# EAGLE board ArduinoDevBoardRevA (EAGLE 9.0.0)
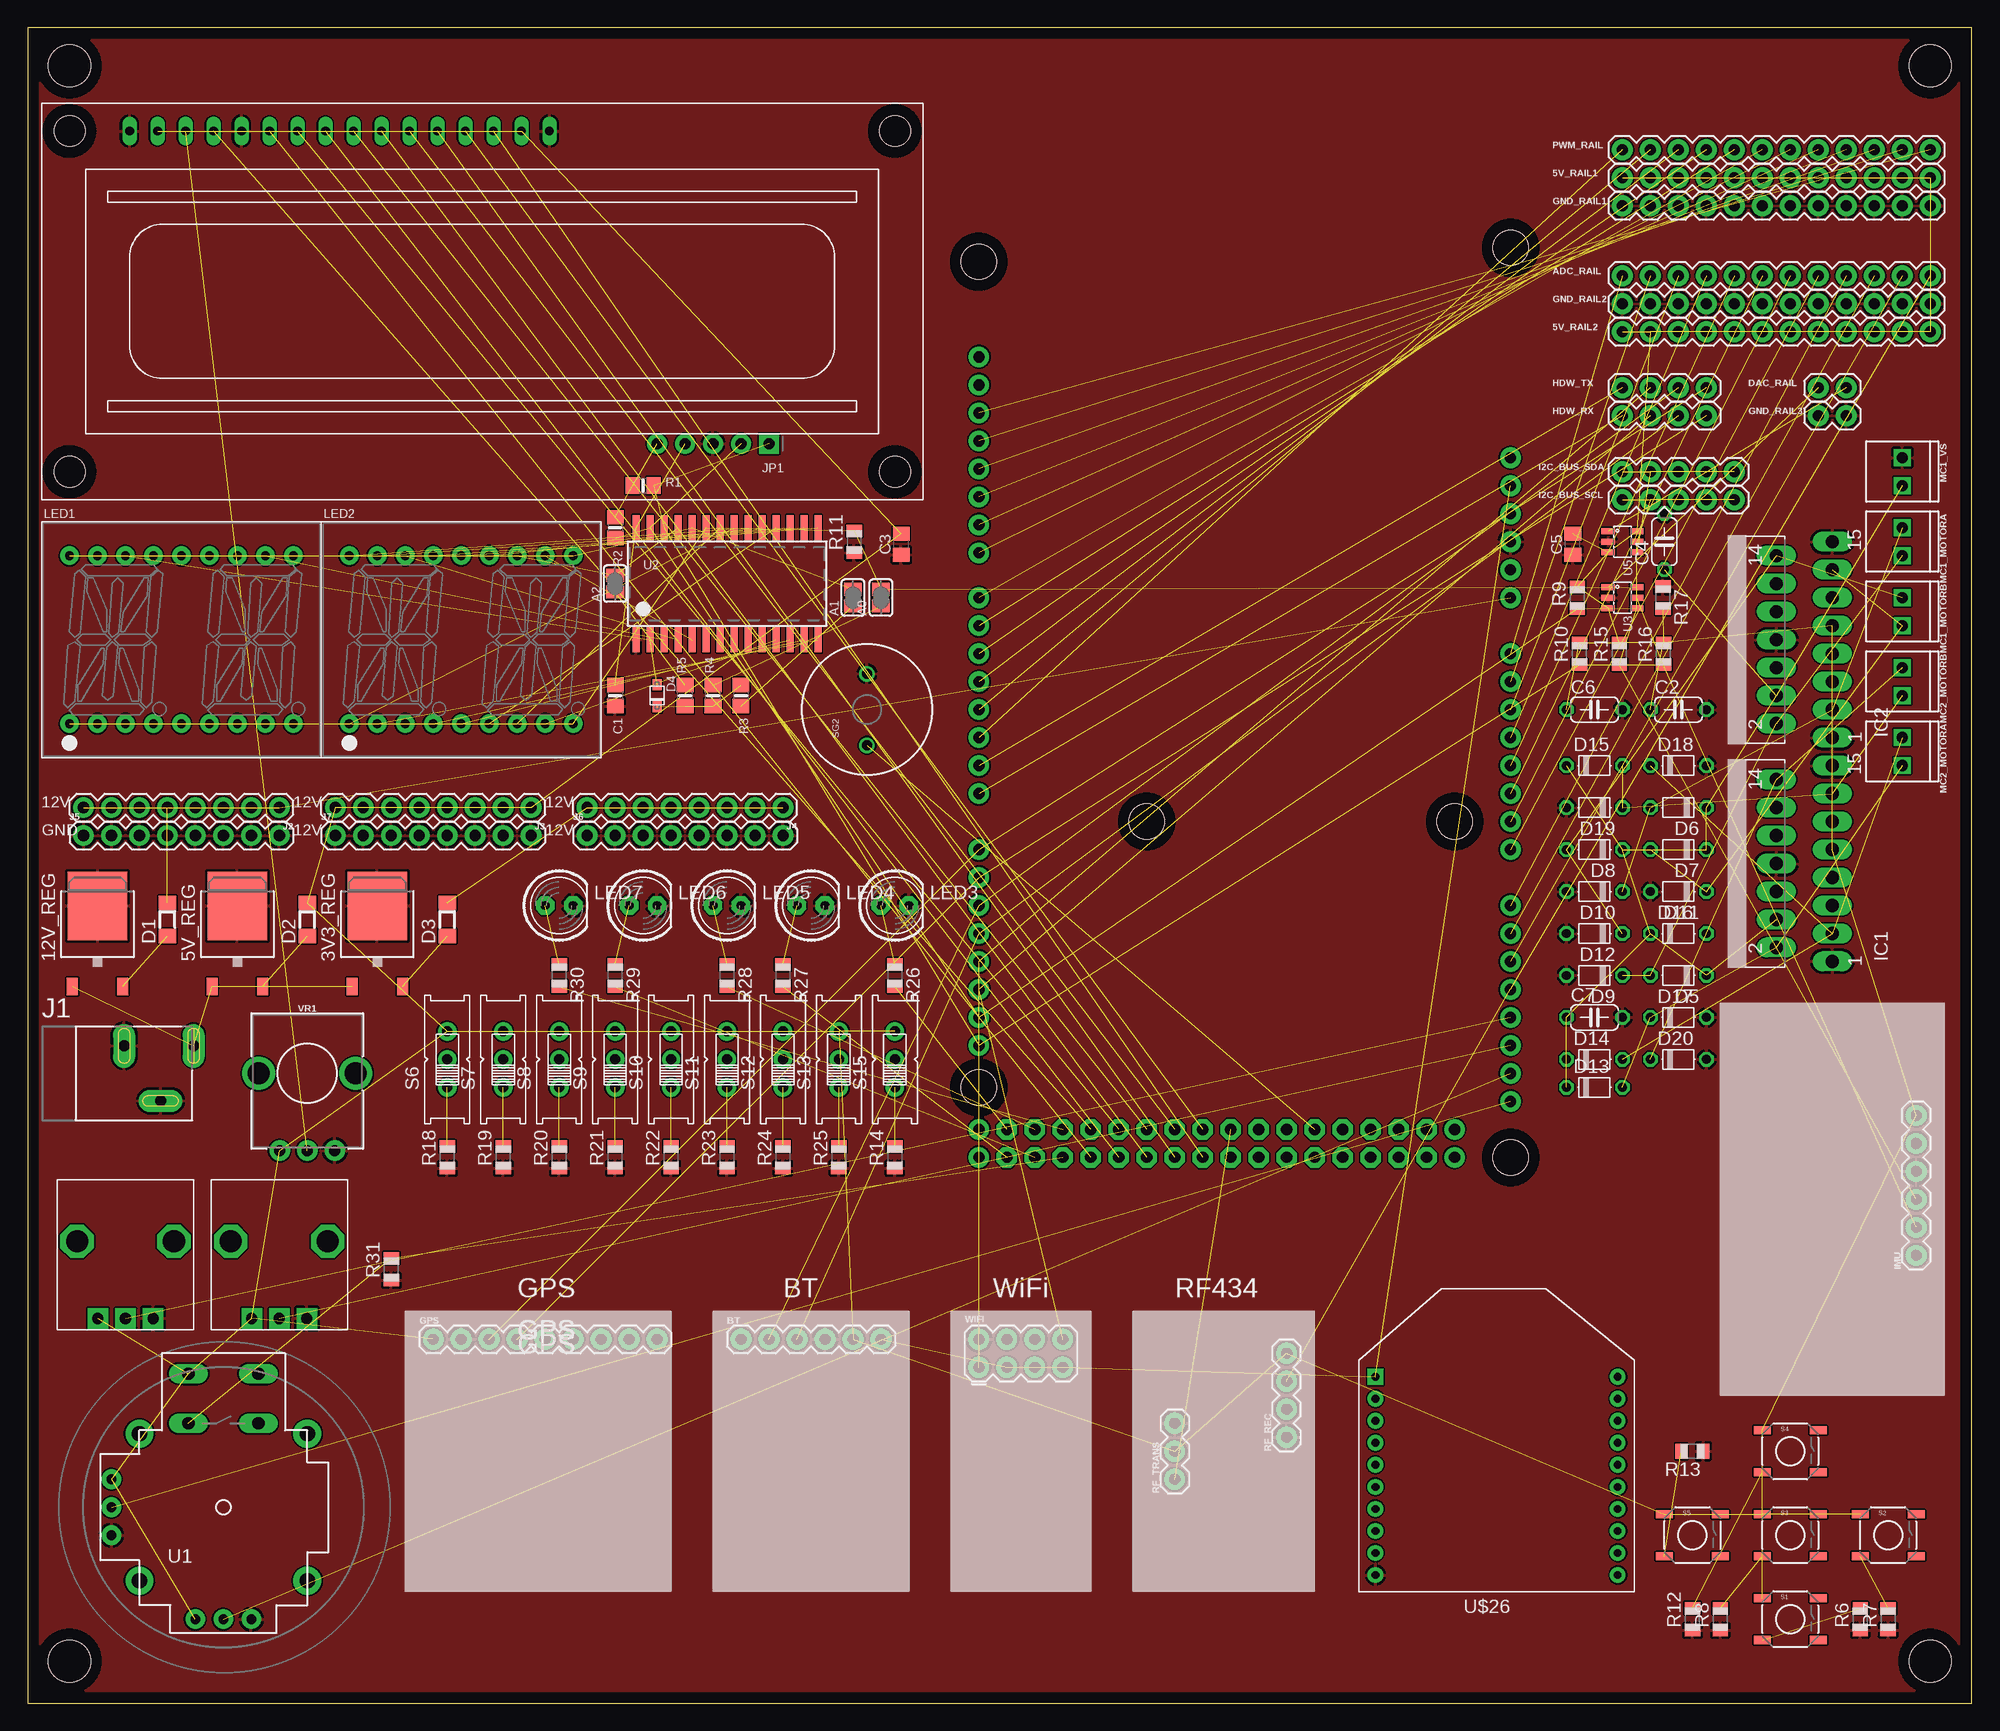
[diagram p0: board, top side]
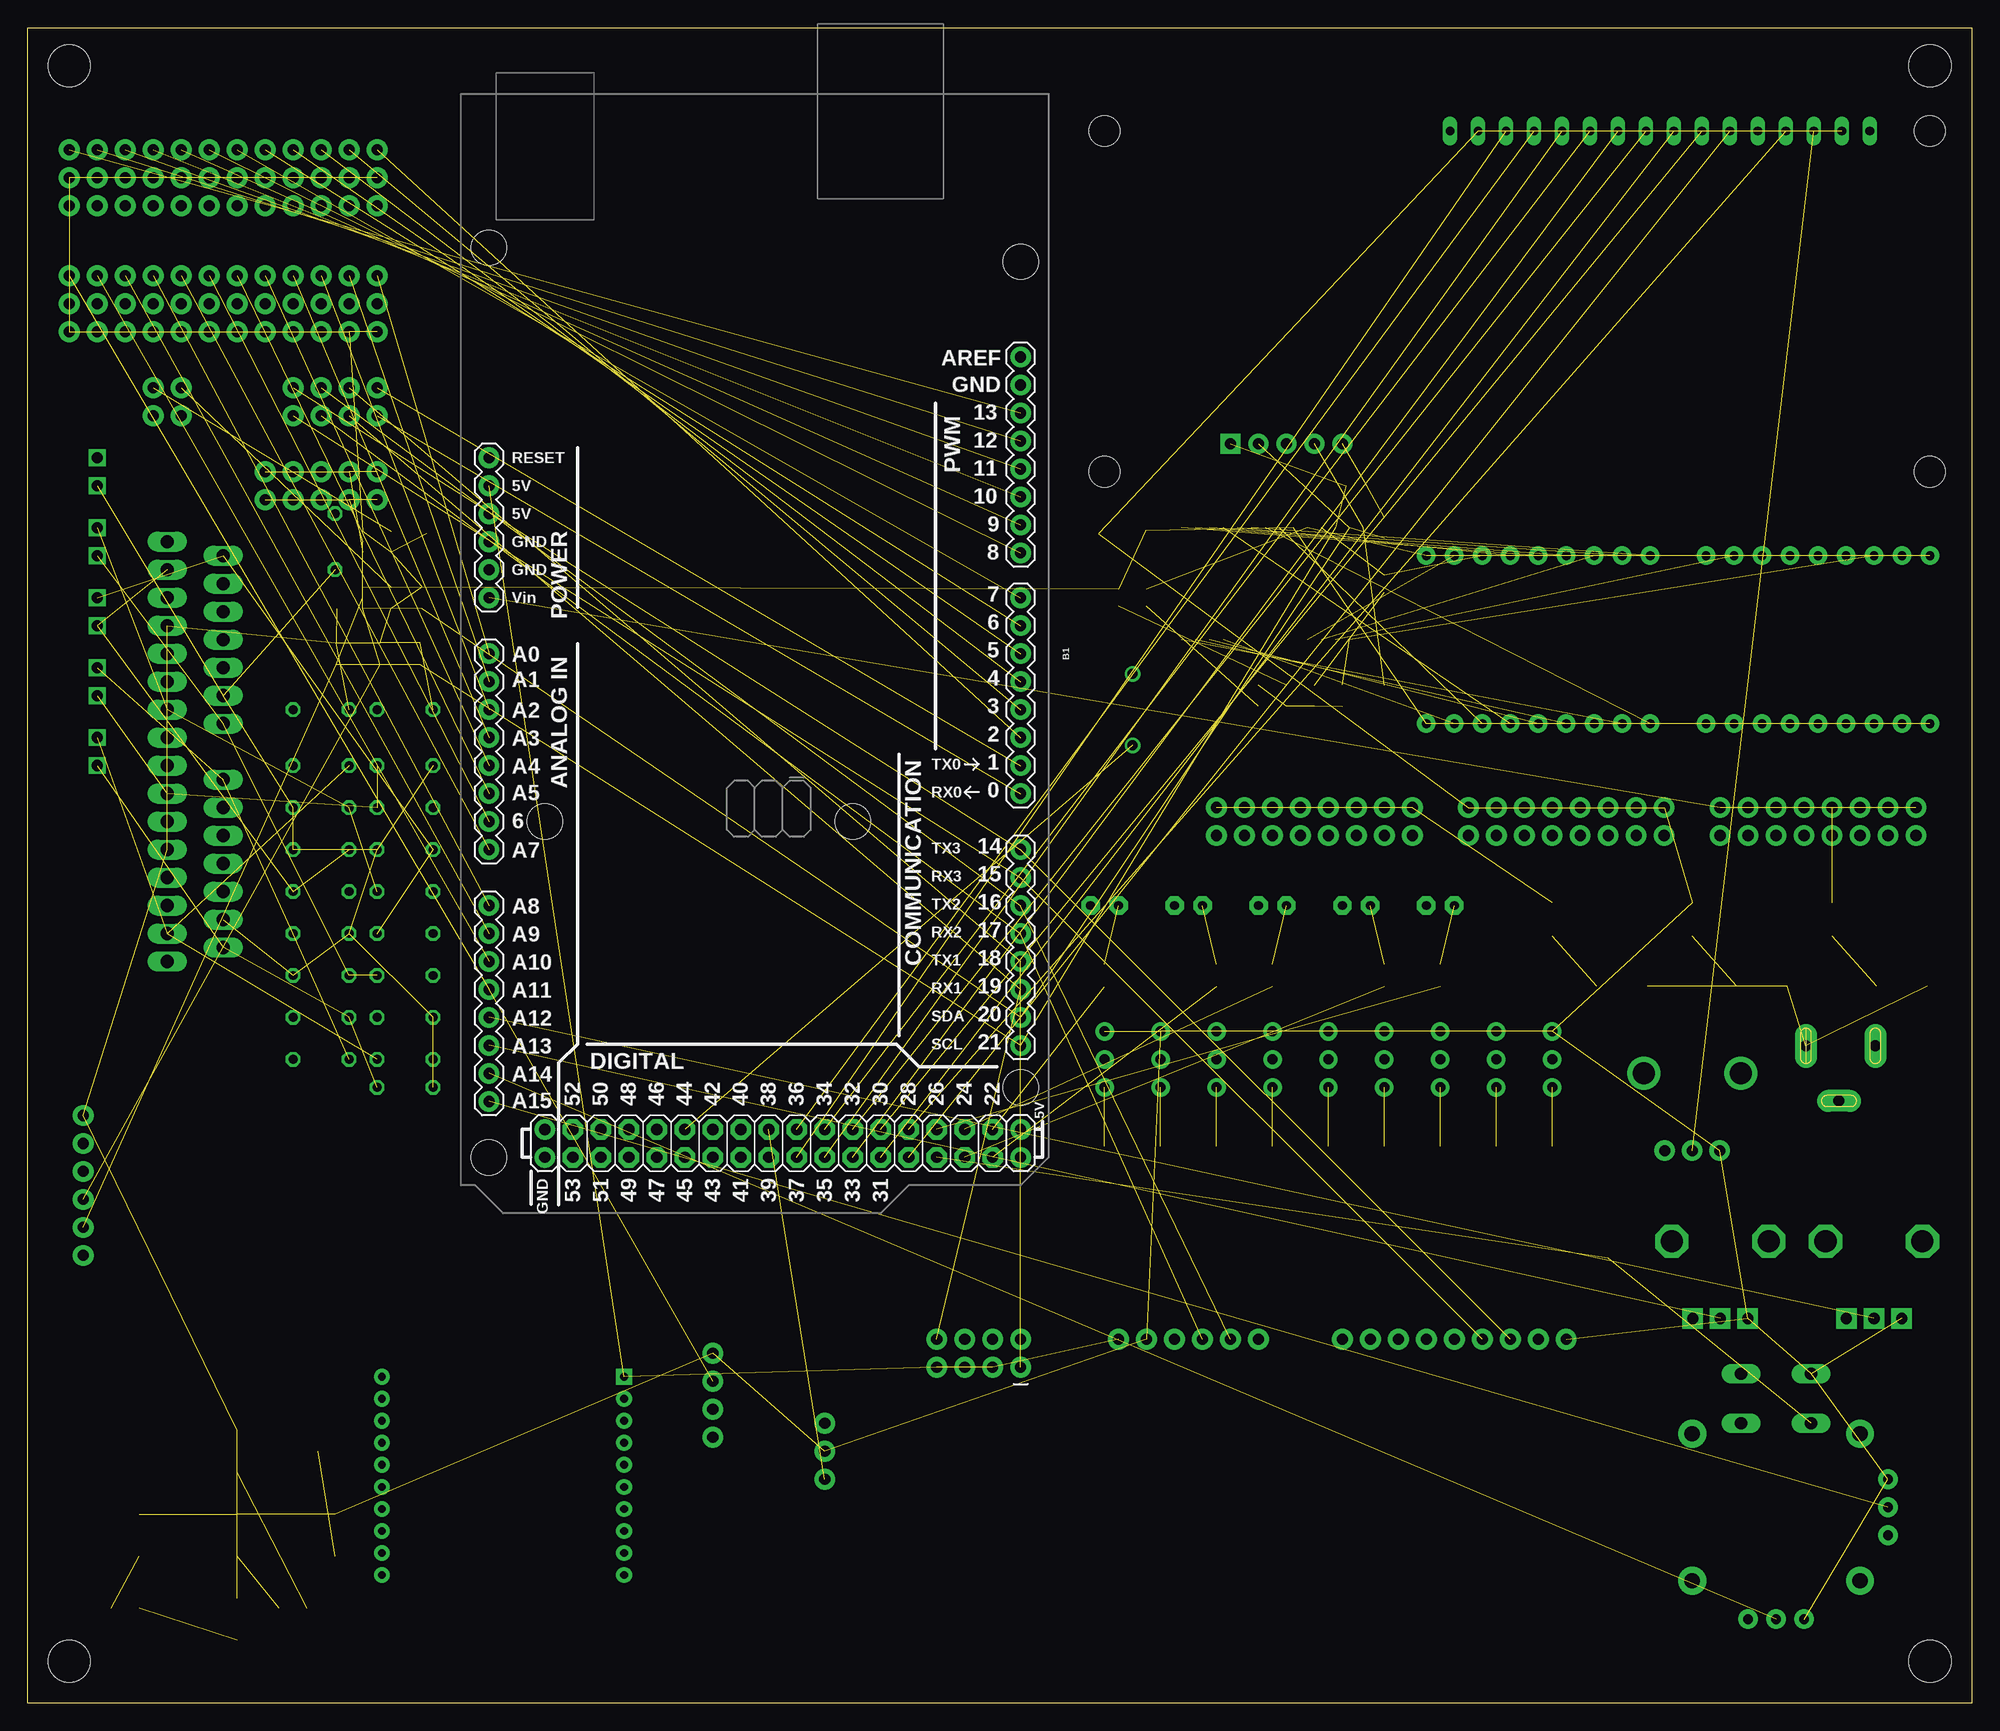
[diagram p1: board, bottom side, seen from below]

Size 176.51 x 152.07 mm. Coordinates in mm from the lower left corner, seen from the top.
Outline: 0,0 176.51,0 176.51,152.07 0,152.07 0,0
Copper layers (1*16): Top 0.035mm / dielectric 1.5mm / Bottom 0.035mm
Design rules "default": minimum track width 6mil, minimum drill 0.35mm, track to track 6mil, track to pad 6mil, pad to pad 6mil, via to via 6mil, smd to smd 6mil, copper to edge 40mil, drill to drill 6mil, minimum pad ring 10mil, minimum via ring 8mil, stop-mask expansion 4mil, vias tented up to drill 0mil, thermal gap 10mil
Holes 3.81 mm at 3.81,3.81 172.72,3.81 3.81,148.59 172.72,148.59

## Footprints (pad centres in the part's own frame; a part is rotated, then mirrored left to right if it is on the bottom)
TO252 = smd 1 x 1.6: 1 -2.28,-4.8; 2 2.28,-4.8 | smd 5.4 x 6.2: 3 0,2.5
1X12 = drill 1.016 pad 1.88: 1 0,0; 2 2.54,0; 3 5.08,0; 4 7.62,0; 5 10.16,0; 6 12.7,0; 7 15.24,0; 8 17.78,0; 9 20.32,0; 10 22.86,0; 11 25.4,0; 12 27.94,0
SOLDERJUMPER_REFLOW_NOPASTE = smd 1.168 x 1.6: 1 -0.762,0; 2 0.762,0
ARDUINO_MEGA = drill 1.016 pad 1.88: 0 13.97,24.13; 1 11.43,24.13; 2 8.89,24.13; 3 6.35,24.13; 3.3V -13.97,-24.13; 4 3.81,24.13; 5 1.27,24.13; 5V@0 -11.43,-24.13; 5V@1 44.45,24.13; 5V@2 46.99,24.13; 6 -1.27,24.13; 7 -3.81,24.13; 8 -7.874,24.13; 9 -10.414,24.13; 10 -12.954,24.13; 11 -15.494,24.13; 12 -18.034,24.13; 13 -20.574,24.13; 14 19.05,24.13; 15 21.59,24.13; 16 24.13,24.13; 17 26.67,24.13; 18 29.21,24.13; 19 31.75,24.13; 20 34.29,24.13; 21 36.83,24.13; A0 1.27,-24.13; A1 3.81,-24.13; A2 6.35,-24.13; A3 8.89,-24.13; A4 11.43,-24.13; A5 13.97,-24.13; A6 16.51,-24.13; A7 19.05,-24.13; A8 24.13,-24.13; A9 26.67,-24.13; A10 29.21,-24.13; A11 31.75,-24.13; A12 34.29,-24.13; A13 36.83,-24.13; A14 39.37,-24.13; A15 41.91,-24.13; AREF -25.654,24.13; GND@0 -8.89,-24.13; GND@1 -6.35,-24.13; GND@2 44.45,-19.05; GND@3 46.99,-19.05; GND@4 -23.114,24.13; RESET -16.51,-24.13; VIN -3.81,-24.13 | drill 1.016 pad 1.88 octagon: 22 44.45,21.59; 23 46.99,21.59; 24 44.45,19.05; 25 46.99,19.05; 26 44.45,16.51; 27 46.99,16.51; 28 44.45,13.97; 29 46.99,13.97; 30 44.45,11.43; 31 46.99,11.43; 32 44.45,8.89; 33 46.99,8.89; 34 44.45,6.35; 35 46.99,6.35; 36 44.45,3.81; 37 46.99,3.81; 38 44.45,1.27; 39 46.99,1.27; 40 44.45,-1.27; 41 46.99,-1.27; 42 44.45,-3.81; 43 46.99,-3.81; 44 44.45,-6.35; 45 46.99,-6.35; 46 44.45,-8.89; 47 46.99,-8.89; 48 44.45,-11.43; 49 46.99,-11.43; 50 44.45,-13.97; 51 46.99,-13.97; 52 44.45,-16.51; 53 46.99,-16.51 | hole 3.2: -34.29,24.13; -35.56,-24.13; 16.51,8.89; 16.51,-19.05; 40.64,24.13; 46.99,-24.13
1X06 = drill 1.016 pad 1.88: 1 0,0; 2 2.54,0; 3 5.08,0; 4 7.62,0; 5 10.16,0; 6 12.7,0
0805-NO = smd 1.3 x 1.5: 1 -0.95,0; 2 0.95,0
C050-024X044 = drill 0.813 octagon: 1 -2.54,0; 2 2.54,0
0805 = smd 1.27 x 1.524: 1 -0.953,0; 2 0.953,0
SOD-123 = smd 1.3 x 1.6: 1 -1.5,0; 2 1.5,0
SOD-323F = smd 1 x 0.8: A -1,0; C 1,0
D-5 = drill 0.813 octagon: A 2.54,0; C -2.54,0
1X02 = drill 1.016 pad 1.88: 1 0,0; 2 2.54,0
1X09 = drill 1.016 pad 1.88: 1 0,0; 2 2.54,0; 3 5.08,0; 4 7.62,0; 5 10.16,0; 6 12.7,0; 7 15.24,0; 8 17.78,0; 9 20.32,0
1X04 = drill 1.016 pad 1.88: 1 0,0; 2 2.54,0; 3 5.08,0; 4 7.62,0
1X05 = drill 1.016 pad 1.88: 1 0,0; 2 2.54,0; 3 5.08,0; 4 7.62,0; 5 10.16,0
MULTIWATT-15 = drill 1.2 long: 1 -8.89,-7.62; 2 -7.62,-2.54; 3 -6.35,-7.62; 4 -5.08,-2.54; 5 -3.81,-7.62; 6 -2.54,-2.54; 7 -1.27,-7.62; 8 0,-2.54; 9 1.27,-7.62; 10 2.54,-2.54; 11 3.81,-7.62; 12 5.08,-2.54; 13 6.35,-7.62; 14 7.62,-2.54; 15 8.89,-7.62
POWER_JACK_SLOT = drill 1 pad 2 long: GND@1 2.58,7.5; GND@2 7.58,10.8; PWR 2.58,13.8
1X08 = drill 1.016 pad 1.88: 1 0,0; 2 2.54,0; 3 5.08,0; 4 7.62,0; 5 10.16,0; 6 12.7,0; 7 15.24,0; 8 17.78,0
1X05_ROUND_70 = drill 1 pad 1.778 square: 1 -5.08,0 | drill 1 pad 1.778: 2 -2.54,0; 3 0,0; 4 2.54,0; 5 5.08,0
SEGMENT_STARTBUST_DUAL_KWA-541CBB = drill 0.8 pad 1.676: 1 -10.16,-7.62; 2 -7.62,-7.62; 3 -5.08,-7.62; 4 -2.54,-7.62; 5 0,-7.62; 6 2.54,-7.62; 7 5.08,-7.62; 8 7.62,-7.62; 9 10.16,-7.62; 10 10.16,7.62; 11 7.62,7.62; 12 5.08,7.62; 13 2.54,7.62; 14 0,7.62; 15 -2.54,7.62; 16 -5.08,7.62; 17 -7.62,7.62; 18 -10.16,7.62
LED5MM = drill 0.813 pad 1.676 octagon: A -1.27,0; K 1.27,0
1X02_2.54_SCREWTERM = drill 1.016 square: P1 2.54,0; P2 0,0
R0805 = smd 1.1 x 1.4: 1 -1,0; 2 1,0
1X03 = drill 1.016 pad 1.88: 1 0,0; 2 2.54,0; 3 5.08,0
TACTILE_SWITCH_SMD = smd 1.524 x 0.762: 1 -2.54,1.905; 2 2.54,1.905; 3 -2.54,-1.905; 4 2.54,-1.905
EG1218 = drill 0.9 pad 1.676: O -2.54,0; P 0,0; S 2.54,0
BUZZER-12MM = drill 0.9: + 3.25,0; - -3.25,0
JOYSTICK = drill 1.1 pad 1.778 long: B1A -3.175,12.12; B1B 3.175,12.12; B2A -3.175,7.62; B2B 3.175,7.62 | drill 0.889 pad 1.778: H1 -2.54,-10.16; H2 0,-10.16; H3 2.54,-10.16; V1 -10.16,2.54; V2 -10.16,0; V3 -10.16,-2.54 | drill 1.397 pad 2.54: MOUNT1 -7.62,6.668; MOUNT2 -7.62,-6.668; MOUNT3 7.62,-6.668; MOUNT4 7.62,6.668
SOP28_300MIL = smd 0.635 x 2.286: P$1 -8.255,-5.08; P$2 -6.985,-5.08; P$3 -5.715,-5.08; P$4 -4.445,-5.08; P$5 -3.175,-5.08; P$6 -1.905,-5.08; P$7 -0.635,-5.08; P$8 0.635,-5.08; P$9 1.905,-5.08; P$10 3.175,-5.08; P$11 4.445,-5.08; P$12 5.715,-5.08; P$13 6.985,-5.08; P$14 8.255,-5.08; P$15 8.255,5.08; P$16 6.985,5.08; P$17 5.715,5.08; P$18 4.445,5.08; P$19 3.175,5.08; P$20 1.905,5.08; P$21 0.635,5.08; P$22 -0.635,5.08; P$23 -1.905,5.08; P$24 -3.175,5.08; P$25 -4.445,5.08; P$26 -5.715,5.08; P$27 -6.985,5.08; P$28 -8.255,5.08
SOT23-6 = smd 0.55 x 1.2: 1 -0.95,-1.3; 2 0,-1.3; 3 0.95,-1.3; 4 0.95,1.3; 5 0,1.3; 6 -0.95,1.3
ALPS_POT = drill 1 pad 1.88 square: P$1 7,-2.5; P$2 7,0; P$3 7,2.5 | drill 2 octagon: P$4 0,-4.4; P$5 0,4.4
XBEE = drill 0.7 pad 1.422 square: 1 -11,5.5 | drill 0.7 pad 1.422: 2 -11,3.5; 3 -11,1.5; 4 -11,-0.5; 5 -11,-2.5; 6 -11,-4.5; 7 -11,-6.5; 8 -11,-8.5; 9 -11,-10.5; 10 -11,-12.5; 11 11,-12.5; 12 11,-10.5; 13 11,-8.5; 14 11,-6.5; 15 11,-4.5; 16 11,-2.5; 17 11,-0.5; 18 11,1.5; 19 11,3.5; 20 11,5.5
POT-PTH-ALPS-KIT = drill 1 pad 1.88: P$1 7,-2.5; P$2 7,0; P$3 7,2.5 | drill 2: P$4 0,-4.4; P$5 0,4.4
2X4 = drill 1.016 pad 1.88: 1 -3.81,-1.27; 2 -3.81,1.27; 3 -1.27,-1.27; 4 -1.27,1.27; 5 1.27,-1.27; 6 1.27,1.27; 7 3.81,-1.27; 8 3.81,1.27
LCD1602 = drill 0.8 long: 1 8,33.46; 2 10.54,33.46; 3 13.08,33.46; 4 15.62,33.46; 5 18.16,33.46; 6 20.7,33.46; 7 23.24,33.46; 8 25.78,33.46; 9 28.32,33.46; 10 30.86,33.46; 11 33.4,33.46; 12 35.94,33.46; 13 38.48,33.46; 14 41.02,33.46; 15 43.56,33.46; 16 46.1,33.46 | hole 2.8: 2.54,2.54; 2.54,33.46; 77.46,33.46; 77.46,2.54

## Placement (x,y rotation side)
3V3_REG  7812DT  [TO252]  31.75,69.85 0 top
5V_RAIL1  [1X12]  144.78,138.43 0 top
5V_RAIL2  [1X12]  144.78,124.46 0 top
5V_REG  7812DT  [TO252]  19.05,69.85 0 top
12V_REG  7812DT  [TO252]  6.35,69.85 0 top
A0  [SOLDERJUMPER_REFLOW_NOPASTE]  77.47,100.33 90 top
A1  [SOLDERJUMPER_REFLOW_NOPASTE]  74.93,100.33 90 top
A2  [SOLDERJUMPER_REFLOW_NOPASTE]  53.34,101.6 90 top
ADC_RAIL  [1X12]  144.78,129.54 0 top
B1  ARDUINO_MEGA_R3FULL  [ARDUINO_MEGA]  110.49,96.52 270 bottom
BT  [1X06]  64.77,33.02 0 top
C1  10uF  [0805-NO]  53.34,91.44 270 top
C2  100nF  [C050-024X044]  149.86,90.17 0 top
C3  0.1uF  [0805]  79.31,105.18 90 top
C4  100nF  [C050-024X044]  148.59,105.41 90 top
C5  0.1uF  [0805]  140.27,105.18 90 top
C6  100nF  [C050-024X044]  142.24,90.17 0 top
C7  100nF  [C050-024X044]  142.24,62.23 0 top
C8  0.1uF  [0805]  -7.62,-5.08 0 top  (outside the outline)
D1  [SOD-123]  12.7,71.12 90 top
D2  [SOD-123]  25.4,71.12 90 top
D3  [SOD-123]  38.1,71.12 90 top
D4  1N4148  [SOD-323F]  57.15,91.44 270 top
D5  [D-5]  149.86,66.04 180 top
D6  [D-5]  149.86,81.28 180 top
D7  [D-5]  149.86,77.47 180 top
D8  [D-5]  142.24,77.47 180 top
D9  [D-5]  142.24,66.04 180 top
D10  [D-5]  142.24,73.66 180 top
D11  [D-5]  149.86,73.66 180 top
D12  [D-5]  142.24,69.85 180 top
D13  [D-5]  142.24,55.88 0 top
D14  [D-5]  142.24,58.42 0 top
D15  [D-5]  142.24,85.09 0 top
D16  [D-5]  149.86,69.85 0 top
D17  [D-5]  149.86,62.23 0 top
D18  [D-5]  149.86,85.09 0 top
D19  [D-5]  142.24,81.28 180 top
D20  [D-5]  149.86,58.42 0 top
DAC_RAIL  [1X02]  162.56,119.38 0 top
GND_RAIL1  [1X12]  144.78,135.89 0 top
GND_RAIL2  [1X12]  144.78,127 0 top
GND_RAIL3  [1X02]  162.56,116.84 0 top
GPS  [1X09]  36.83,33.02 0 top
HDW_RX  [1X04]  144.78,116.84 0 top
HDW_TX  [1X04]  144.78,119.38 0 top
I2C_BUS_SCL  [1X05]  144.78,109.22 0 top
I2C_BUS_SDA  [1X05]  144.78,111.76 0 top
IC1  L298  [MULTIWATT-15]  156.21,76.2 90 top
IC2  L298  [MULTIWATT-15]  156.21,96.52 90 top
IMU  [1X06]  171.45,40.64 90 top
J1  POWER_JACKSLT  [POWER_JACK_SLOT]  1.27,62.23 270 top
J2  [1X08]  22.86,81.28 180 top
J3  [1X08]  45.72,81.28 180 top
J4  [1X08]  68.58,81.28 180 top
J5  [1X08]  5.08,78.74 0 top
J6  [1X08]  50.8,78.74 0 top
J7  [1X08]  27.94,78.74 0 top
JP1  [1X05_ROUND_70]  62.23,114.3 180 top
LED1  [SEGMENT_STARTBUST_DUAL_KWA-541CBB]  13.97,96.52 0 top
LED2  [SEGMENT_STARTBUST_DUAL_KWA-541CBB]  39.37,96.52 0 top
LED3  [LED5MM]  78.74,72.39 0 top
LED4  [LED5MM]  71.12,72.39 0 top
LED5  [LED5MM]  63.5,72.39 0 top
LED6  [LED5MM]  55.88,72.39 0 top
LED7  [LED5MM]  48.26,72.39 0 top
MC1_MOTORA  [1X02_2.54_SCREWTERM]  170.18,106.68 270 top
MC1_MOTORB  [1X02_2.54_SCREWTERM]  170.18,100.33 270 top
MC1_VS  [1X02_2.54_SCREWTERM]  170.18,113.03 270 top
MC2_MOTORA  [1X02_2.54_SCREWTERM]  170.18,87.63 270 top
MC2_MOTORB  [1X02_2.54_SCREWTERM]  170.18,93.98 270 top
PWM_RAIL  [1X12]  144.78,140.97 0 top
R1  10K  [0805-NO]  55.88,110.49 0 top
R2  10K  [0805-NO]  53.34,106.68 270 top
R3  47K  [0805-NO]  64.77,91.44 270 top
R4  47K  [0805-NO]  62.23,91.44 90 top
R5  47K  [0805-NO]  59.69,91.44 90 top
R6  [R0805]  166.37,7.62 90 top
R7  [R0805]  168.91,7.62 90 top
R8  [R0805]  153.67,7.62 90 top
R9  10k  [R0805]  140.69,100.32 90 top
R10  10k  [R0805]  140.89,95.24 90 top
R11  10k  [R0805]  75.05,105.4 90 top
R12  [R0805]  151.13,7.62 90 top
R13  [R0805]  151.13,22.86 180 top
R14  10K  [R0805]  78.74,49.53 90 top
R15  10k  [R0805]  144.5,95.24 90 top
R16  10k  [R0805]  148.51,95.24 90 top
R17  10k  [R0805]  148.47,100.34 270 top
R18  10K  [R0805]  38.1,49.53 90 top
R19  10K  [R0805]  43.18,49.53 90 top
R20  10K  [R0805]  48.26,49.53 90 top
R21  10K  [R0805]  53.34,49.53 90 top
R22  10K  [R0805]  58.42,49.53 90 top
R23  10K  [R0805]  63.5,49.53 90 top
R24  10K  [R0805]  68.58,49.53 90 top
R25  10K  [R0805]  73.66,49.53 90 top
R26  470  [R0805]  78.74,66.04 270 top
R27  470  [R0805]  68.58,66.04 270 top
R28  470  [R0805]  63.5,66.04 270 top
R29  470  [R0805]  53.34,66.04 270 top
R30  470  [R0805]  48.26,66.04 270 top
R31  10k  [R0805]  33.02,39.37 90 top
RF_REC  [1X04]  114.3,24.13 90 top
RF_TRANS  [1X03]  104.14,20.32 90 top
S1  [TACTILE_SWITCH_SMD]  160.02,7.62 0 top
S2  [TACTILE_SWITCH_SMD]  168.91,15.24 0 top
S3  [TACTILE_SWITCH_SMD]  160.02,15.24 0 top
S4  [TACTILE_SWITCH_SMD]  160.02,22.86 0 top
S5  [TACTILE_SWITCH_SMD]  151.13,15.24 0 top
S6  [EG1218]  38.1,58.42 90 top
S7  [EG1218]  43.18,58.42 90 top
S8  [EG1218]  48.26,58.42 90 top
S9  [EG1218]  53.34,58.42 90 top
S10  [EG1218]  58.42,58.42 90 top
S11  [EG1218]  63.5,58.42 90 top
S12  [EG1218]  68.58,58.42 90 top
S13  [EG1218]  73.66,58.42 90 top
S15  [EG1218]  78.74,58.42 90 top
SG2  BUZZERPTH  [BUZZER-12MM]  76.2,90.17 90 top
U1  JOYSTICKPTH  [JOYSTICK]  17.78,17.78 0 top
U2  [SOP28_300MIL]  63.5,101.6 0 top
U3  MCP4725A1T-E/CH  [SOT23-6]  144.78,100.33 270 top
U5  MCP4725A1T-E/CH  [SOT23-6]  144.78,105.41 270 top
U$12  POT  [ALPS_POT]  22.86,41.91 270 top
U$14  POT  [ALPS_POT]  8.89,41.91 270 top
U$26  XBEE  [XBEE]  133.35,24.13 0 top
VR1  10k  [POT-PTH-ALPS-KIT]  25.4,57.15 270 top
WIFI  [2X4]  90.17,31.75 0 top
X1  HD44780LCD-1602  [LCD1602]  1.27,109.22 0 top

## Library data of the parts
3V3_REG 5V_REG 12V_REG D4 LED3-LED7 R6-R31 S6-S13 S15 U1 U$26 X1 = adafruit
5V_RAIL1 5V_RAIL2 ADC_RAIL DAC_RAIL GND_RAIL1-GND_RAIL3 GPS I2C_BUS_SCL I2C_BUS_SDA MC1_MOTORA MC1_MOTORB MC1_VS MC2_MOTORA MC2_MOTORB PWM_RAIL RF_TRANS WIFI = SparkFun-Connectors
A0 A1 A2 C1 JP1 LED1 LED2 R1-R5 U2 U3 U5 = microbuilder
B1 = SparkFun-Boards
BT IMU = SparkFun-Connectors; PROD_ID: CONN-08437
C2 C4 C6 C7 = rcl; SPICEPREFIX: C
C3 C5 C8 = cap-master
D1-D3 = MAX9812
D5-D20 = diode
HDW_RX HDW_TX RF_REC = SparkFun-Connectors; PROD_ID: CONN-09696
IC1 IC2 = st-microelectronics; MPN: L298N; OC_FARNELL: 1589425; OC_NEWARK: 32M1527
J1 S1-S5 SG2 U$12 U$14 = SparkFun
J2-J7 = SparkFun-Connectors; PROD_ID: CONN-08438
VR1 = SparkFun-Resistors; PROD_ID: RES-09177; SF_SKU: COM-09288

## Nets
3.3V: B1.3.3V BT.6 U$26.1 WIFI.3 WIFI.7
5V: 5V_RAIL1.1 5V_RAIL1.2 5V_RAIL1.3 5V_RAIL1.4 5V_RAIL1.5 5V_RAIL1.6 5V_RAIL1.7 5V_RAIL1.8 5V_RAIL1.9 5V_RAIL1.10 5V_RAIL1.11 5V_RAIL1.12 5V_RAIL2.1 5V_RAIL2.2 5V_RAIL2.3 5V_RAIL2.4 5V_RAIL2.5 5V_RAIL2.6 5V_RAIL2.7 5V_RAIL2.8 5V_RAIL2.9 5V_RAIL2.10 5V_RAIL2.11 5V_RAIL2.12 BT.5 C2.1 C3.2 C5.2 C6.1 D2.2 GPS.1 IC1.9 IC2.9 IMU.6 J3.1 J3.2 J3.3 J3.4 J3.5 J3.6 J3.7 J3.8 R9.2 R10.2 R15.2 R16.2 R17.2 RF_REC.4 RF_TRANS.2 S1.1 S2.1 S3.1 S4.1 S5.1 S6.S S7.S S8.S S9.S S10.S S11.S S12.S S13.S S15.S U1.B1A U1.H1 U1.V1 U3.3 U5.3 U5.6 U$12.P$1 U$14.P$1 VR1.P$1 X1.2 X1.15
12V: B1.VIN D1.2 J2.1 J2.2 J2.3 J2.4 J2.5 J2.6 J2.7 J2.8
A0: A0.2 LED1.9 LED2.9 R11.2 U2.P$23 U3.6
A1: A1.2 LED1.10 LED2.10 U2.P$24
A2: A2.2 LED1.12 LED2.12 U2.P$25
ADC1: ADC_RAIL.1 B1.A0
ADC2: ADC_RAIL.2 B1.A1
ADC3: ADC_RAIL.3 B1.A2
ADC4: ADC_RAIL.4 B1.A3
ADC5: ADC_RAIL.5 B1.A4
ADC6: ADC_RAIL.6 B1.A5
ADC7: ADC_RAIL.7 B1.A6
ADC8: ADC_RAIL.8 B1.A7
ADC9: ADC_RAIL.9 B1.A8
ADC10: ADC_RAIL.10 B1.A9
ADC11: ADC_RAIL.11 B1.A10
ADC12: ADC_RAIL.12 B1.A11 RF_REC.3
BUTTON1: R6.2 S1.3
BUTTON2: R13.2 S5.3
BUTTON3: R7.2 S2.3
BUTTON4: R12.2 S4.3
BUTTON5: R8.2 S3.3
BUZZER: B1.44 SG2.-
COM0: D4.A LED1.16 U2.P$2
COM1: LED1.11 U2.P$3
COM2: LED2.16 U2.P$4
COM3: LED2.11 U2.P$5
GND: 3V3_REG.3 5V_REG.3 12V_REG.3 B1.GND@0 BT.4 C1.2 C2.2 C3.1 C4.2 C5.1 C6.2 C7.2 D9.A D10.A D11.A D12.A D17.A D18.A D19.A D20.A GND_RAIL1.1 GND_RAIL1.2 GND_RAIL1.3 GND_RAIL1.4 GND_RAIL1.5 GND_RAIL1.6 GND_RAIL1.7 GND_RAIL1.8 GND_RAIL1.9 GND_RAIL1.10 GND_RAIL1.11 GND_RAIL1.12 GND_RAIL2.1 GND_RAIL2.2 GND_RAIL2.3 GND_RAIL2.4 GND_RAIL2.5 GND_RAIL2.6 GND_RAIL2.7 GND_RAIL2.8 GND_RAIL2.9 GND_RAIL2.10 GND_RAIL2.11 GND_RAIL2.12 GND_RAIL3.1 GND_RAIL3.2 GPS.2 IC1.1 IC1.8 IC1.15 IC2.1 IC2.8 IC2.15 IMU.4 J1.GND@1 J1.GND@2 J5.1 J5.2 J5.3 J5.4 J5.5 J5.6 J5.7 J5.8 J6.1 J6.2 J6.3 J6.4 J6.5 J6.6 J6.7 J6.8 J7.1 J7.2 J7.3 J7.4 J7.5 J7.6 J7.7 J7.8 JP1.3 LED3.K LED4.K LED5.K LED6.K LED7.K MC1_VS.P2 R6.1 R7.1 R8.1 R11.1 R12.1 R13.1 R14.1 R17.1 R18.1 R19.1 R20.1 R21.1 R22.1 R23.1 R24.1 R25.1 R31.1 RF_REC.1 RF_TRANS.3 SG2.+ U1.H3 U1.V3 U2.P$1 U3.2 U5.2 U$12.P$3 U$14.P$3 U$26.10 VR1.P$3 WIFI.2 X1.1 X1.5 X1.16
HDW_RX0: B1.0 HDW_RX.1
HDW_RX1: B1.19 HDW_RX.2 WIFI.8
HDW_RX2: B1.17 BT.3 HDW_RX.3
HDW_RX3: B1.15 GPS.4 HDW_RX.4
HDW_TX0: B1.1 HDW_TX.1
HDW_TX1: B1.18 HDW_TX.2 WIFI.1
HDW_TX2: B1.16 BT.2 HDW_TX.3
HDW_TX3: B1.14 GPS.3 HDW_TX.4
JOYSTICK_BUTTON: B1.27 R31.2 U1.B2A
JOYSTICK_X: B1.A14 U1.H2
JOYSTICK_Y: B1.A15 U1.V2
LCD_D0: B1.30 X1.7
LCD_D1: B1.31 X1.8
LCD_D2: B1.32 X1.9
LCD_D3: B1.33 X1.10
LCD_D4: B1.34 X1.11
LCD_D5: B1.35 X1.12
LCD_D6: B1.36 X1.13
LCD_D7: B1.37 X1.14
LCD_E: B1.29 X1.6
LCD_RS: B1.28 X1.4
MCONTROLR1_ENB_A: IC2.6
MCONTROLR1_ENB_B: IC2.11
MCONTROLR1_INP1: IC2.5
MCONTROLR1_INP2: IC2.7
MCONTROLR1_INP3: IC2.10
MCONTROLR1_INP4: IC2.12
MCONTROLR2_ENB_A: IC1.6
MCONTROLR2_ENB_B: IC1.11
MCONTROLR2_INP1: IC1.5
MCONTROLR2_INP2: IC1.7
MCONTROLR2_INP3: IC1.10
MCONTROLR2_INP4: IC1.12
N$1: LED3.A R26.1
N$2: LED4.A R27.1
N$3: LED5.A R28.1
N$4: LED6.A R29.1
N$5: 12V_REG.2 D1.1
N$6: LED7.A R30.1
N$7: B1.22 R26.2
N$8: B1.23 R27.2
N$9: B1.24 R28.2
N$10: 5V_REG.2 D2.1
N$11: 3V3_REG.2 D3.1
N$13: B1.25 R29.2
N$14: D3.2 J4.1 J4.2 J4.3 J4.4 J4.5 J4.6 J4.7 J4.8
N$15: B1.26 R30.2
N$16: LED1.7 LED2.7 U2.P$22
N$17: LED1.1 LED2.1 U2.P$21
N$18: LED1.18 LED2.18 U2.P$20
N$19: A1.1 R3.2
N$20: A0.1 R4.2
N$21: LED1.13 LED2.13 U2.P$19
N$22: LED1.6 LED2.6 U2.P$18
N$23: D4.C R3.1 R4.1 R5.1
N$24: A2.1 R5.2
N$25: LED1.17 LED2.17 U2.P$17
N$26: LED1.15 LED2.15 U2.P$16
N$27: LED1.14 LED2.14 U2.P$15
N$28: LED1.2 LED2.2 U2.P$14
N$29: LED1.4 LED2.4 U2.P$13
N$30: LED1.5 LED2.5 U2.P$12
N$31: LED1.8 LED2.8 U2.P$11
N$32: JP1.5 R1.1 R2.1
N$33: D13.A D17.C IC1.2 MC2_MOTORA.P1
N$34: D14.A D18.C IC1.3 MC2_MOTORA.P2
N$35: D15.A D19.C IC1.13 MC2_MOTORB.P1
N$36: D16.A D20.C IC1.14 MC2_MOTORB.P2
N$37: B1.A12 U$14.P$2
N$38: B1.A13 U$12.P$2
N$39: VR1.P$2 X1.3
N$46: D5.A D9.C IC2.2 MC1_MOTORA.P1
N$47: D6.A D10.C IC2.3 MC1_MOTORA.P2
N$48: D7.A D11.C IC2.13 MC1_MOTORB.P1
N$49: D8.A D12.C IC2.14 MC1_MOTORB.P2
N$50: R14.2 S15.O
N$51: C4.1 C7.1 D5.C D6.C D7.C D8.C D13.C D14.C D15.C D16.C IC1.4 IC2.4 MC1_VS.P1
N$52: R18.2 S6.O
N$53: R19.2 S7.O
N$54: R20.2 S8.O
N$55: R21.2 S9.O
N$56: R22.2 S10.O
N$57: R23.2 S11.O
N$58: R24.2 S12.O
N$59: R25.2 S13.O
PWM1: B1.2 PWM_RAIL.1
PWM2: B1.3 PWM_RAIL.2
PWM3: B1.4 PWM_RAIL.3
PWM4: B1.5 PWM_RAIL.4
PWM5: B1.6 PWM_RAIL.5
PWM6: B1.7 PWM_RAIL.6
PWM7: B1.8 PWM_RAIL.7
PWM8: B1.9 PWM_RAIL.8
PWM9: B1.10 PWM_RAIL.9
PWM10: B1.11 PWM_RAIL.10
PWM11: B1.12 PWM_RAIL.11
PWM12: B1.13 PWM_RAIL.12
RF_TRANS: B1.38 RF_TRANS.1
SCL: B1.21 I2C_BUS_SCL.1 I2C_BUS_SCL.2 I2C_BUS_SCL.3 I2C_BUS_SCL.4 I2C_BUS_SCL.5 IMU.2 JP1.1 R1.2 R10.1 R16.1 U2.P$26 U3.5 U5.5
SDA: B1.20 I2C_BUS_SDA.1 I2C_BUS_SDA.2 I2C_BUS_SDA.3 I2C_BUS_SDA.4 I2C_BUS_SDA.5 IMU.3 JP1.2 R2.2 R9.1 R15.1 U2.P$27 U3.4 U5.4
SW1: S15.P
SW2: S6.P
SW3: S7.P
SW4: S8.P
SW6: S9.P
SW7: S10.P
SW8: S11.P
SW9: S12.P
SW10: S13.P
VDD: C1.1 JP1.4 U2.P$28
VIN: 3V3_REG.1 5V_REG.1 12V_REG.1 J1.PWR
VOUT1: DAC_RAIL.1 U3.1
VOUT2: DAC_RAIL.2 U5.1

## Tracks (layer width: path | path; a pad name or v marks a point on that pad's centre or on a via)
3.3V  (4 unrouted)
5V  (73 unrouted)
12V  (9 unrouted)
A0  (5 unrouted)
A1  (3 unrouted)
A2  (3 unrouted)
ADC1  (1 unrouted)
ADC2  (1 unrouted)
ADC3  (1 unrouted)
ADC4  (1 unrouted)
ADC5  (1 unrouted)
ADC6  (1 unrouted)
ADC7  (1 unrouted)
ADC8  (1 unrouted)
ADC9  (1 unrouted)
ADC10  (1 unrouted)
ADC11  (1 unrouted)
ADC12  (2 unrouted)
BUTTON1  (1 unrouted)
BUTTON2  (1 unrouted)
BUTTON3  (1 unrouted)
BUTTON4  (1 unrouted)
BUTTON5  (1 unrouted)
BUZZER  (1 unrouted)
COM0  (2 unrouted)
COM1  (1 unrouted)
COM2  (1 unrouted)
COM3  (1 unrouted)
GND
  pour Top: 0,0 0,152.4 176.53,152.4 176.53,0
HDW_RX0  (1 unrouted)
HDW_RX1  (2 unrouted)
HDW_RX2  (2 unrouted)
HDW_RX3  (2 unrouted)
HDW_TX0  (1 unrouted)
HDW_TX1  (2 unrouted)
HDW_TX2  (2 unrouted)
HDW_TX3  (2 unrouted)
JOYSTICK_BUTTON  (2 unrouted)
JOYSTICK_X  (1 unrouted)
JOYSTICK_Y  (1 unrouted)
LCD_D0  (1 unrouted)
LCD_D1  (1 unrouted)
LCD_D2  (1 unrouted)
LCD_D3  (1 unrouted)
LCD_D4  (1 unrouted)
LCD_D5  (1 unrouted)
LCD_D6  (1 unrouted)
LCD_D7  (1 unrouted)
LCD_E  (1 unrouted)
LCD_RS  (1 unrouted)
N$1  (1 unrouted)
N$2  (1 unrouted)
N$3  (1 unrouted)
N$4  (1 unrouted)
N$5  (1 unrouted)
N$6  (1 unrouted)
N$7  (1 unrouted)
N$8  (1 unrouted)
N$9  (1 unrouted)
N$10  (1 unrouted)
N$11  (1 unrouted)
N$13  (1 unrouted)
N$14  (8 unrouted)
N$15  (1 unrouted)
N$16  (2 unrouted)
N$17  (2 unrouted)
N$18  (2 unrouted)
N$19  (1 unrouted)
N$20  (1 unrouted)
N$21  (2 unrouted)
N$22  (2 unrouted)
N$23  (3 unrouted)
N$24  (1 unrouted)
N$25  (2 unrouted)
N$26  (2 unrouted)
N$27  (2 unrouted)
N$28  (2 unrouted)
N$29  (2 unrouted)
N$30  (2 unrouted)
N$31  (2 unrouted)
N$32  (2 unrouted)
N$33  (3 unrouted)
N$34  (3 unrouted)
N$35  (3 unrouted)
N$36  (3 unrouted)
N$37  (1 unrouted)
N$38  (1 unrouted)
N$39  (1 unrouted)
N$46  (3 unrouted)
N$47  (3 unrouted)
N$48  (3 unrouted)
N$49  (3 unrouted)
N$50  (1 unrouted)
N$51  (12 unrouted)
N$52  (1 unrouted)
N$53  (1 unrouted)
N$54  (1 unrouted)
N$55  (1 unrouted)
N$56  (1 unrouted)
N$57  (1 unrouted)
N$58  (1 unrouted)
N$59  (1 unrouted)
PWM1  (1 unrouted)
PWM2  (1 unrouted)
PWM3  (1 unrouted)
PWM4  (1 unrouted)
PWM5  (1 unrouted)
PWM6  (1 unrouted)
PWM7  (1 unrouted)
PWM8  (1 unrouted)
PWM9  (1 unrouted)
PWM10  (1 unrouted)
PWM11  (1 unrouted)
PWM12  (1 unrouted)
RF_TRANS  (1 unrouted)
SCL  (13 unrouted)
SDA  (13 unrouted)
VDD  (2 unrouted)
VIN  (3 unrouted)
VOUT1  (1 unrouted)
VOUT2  (1 unrouted)

## Text on the board
tPlace: 12V | 12V | 12V | GND | 12V | 12V | GPS | BT | WiFi | RF434 | GPS | GPS | GPS